# Altium PCB main.PcbDoc
Units mm, origin at the board's own origin, x right, y up, seen from the top; angles counter-clockwise.
Board outline 159.52 x 153.88 mm, 2 copper layers (Top Layer, Bottom Layer); 58 components, 57 nets, 216 pads, 198 vias.
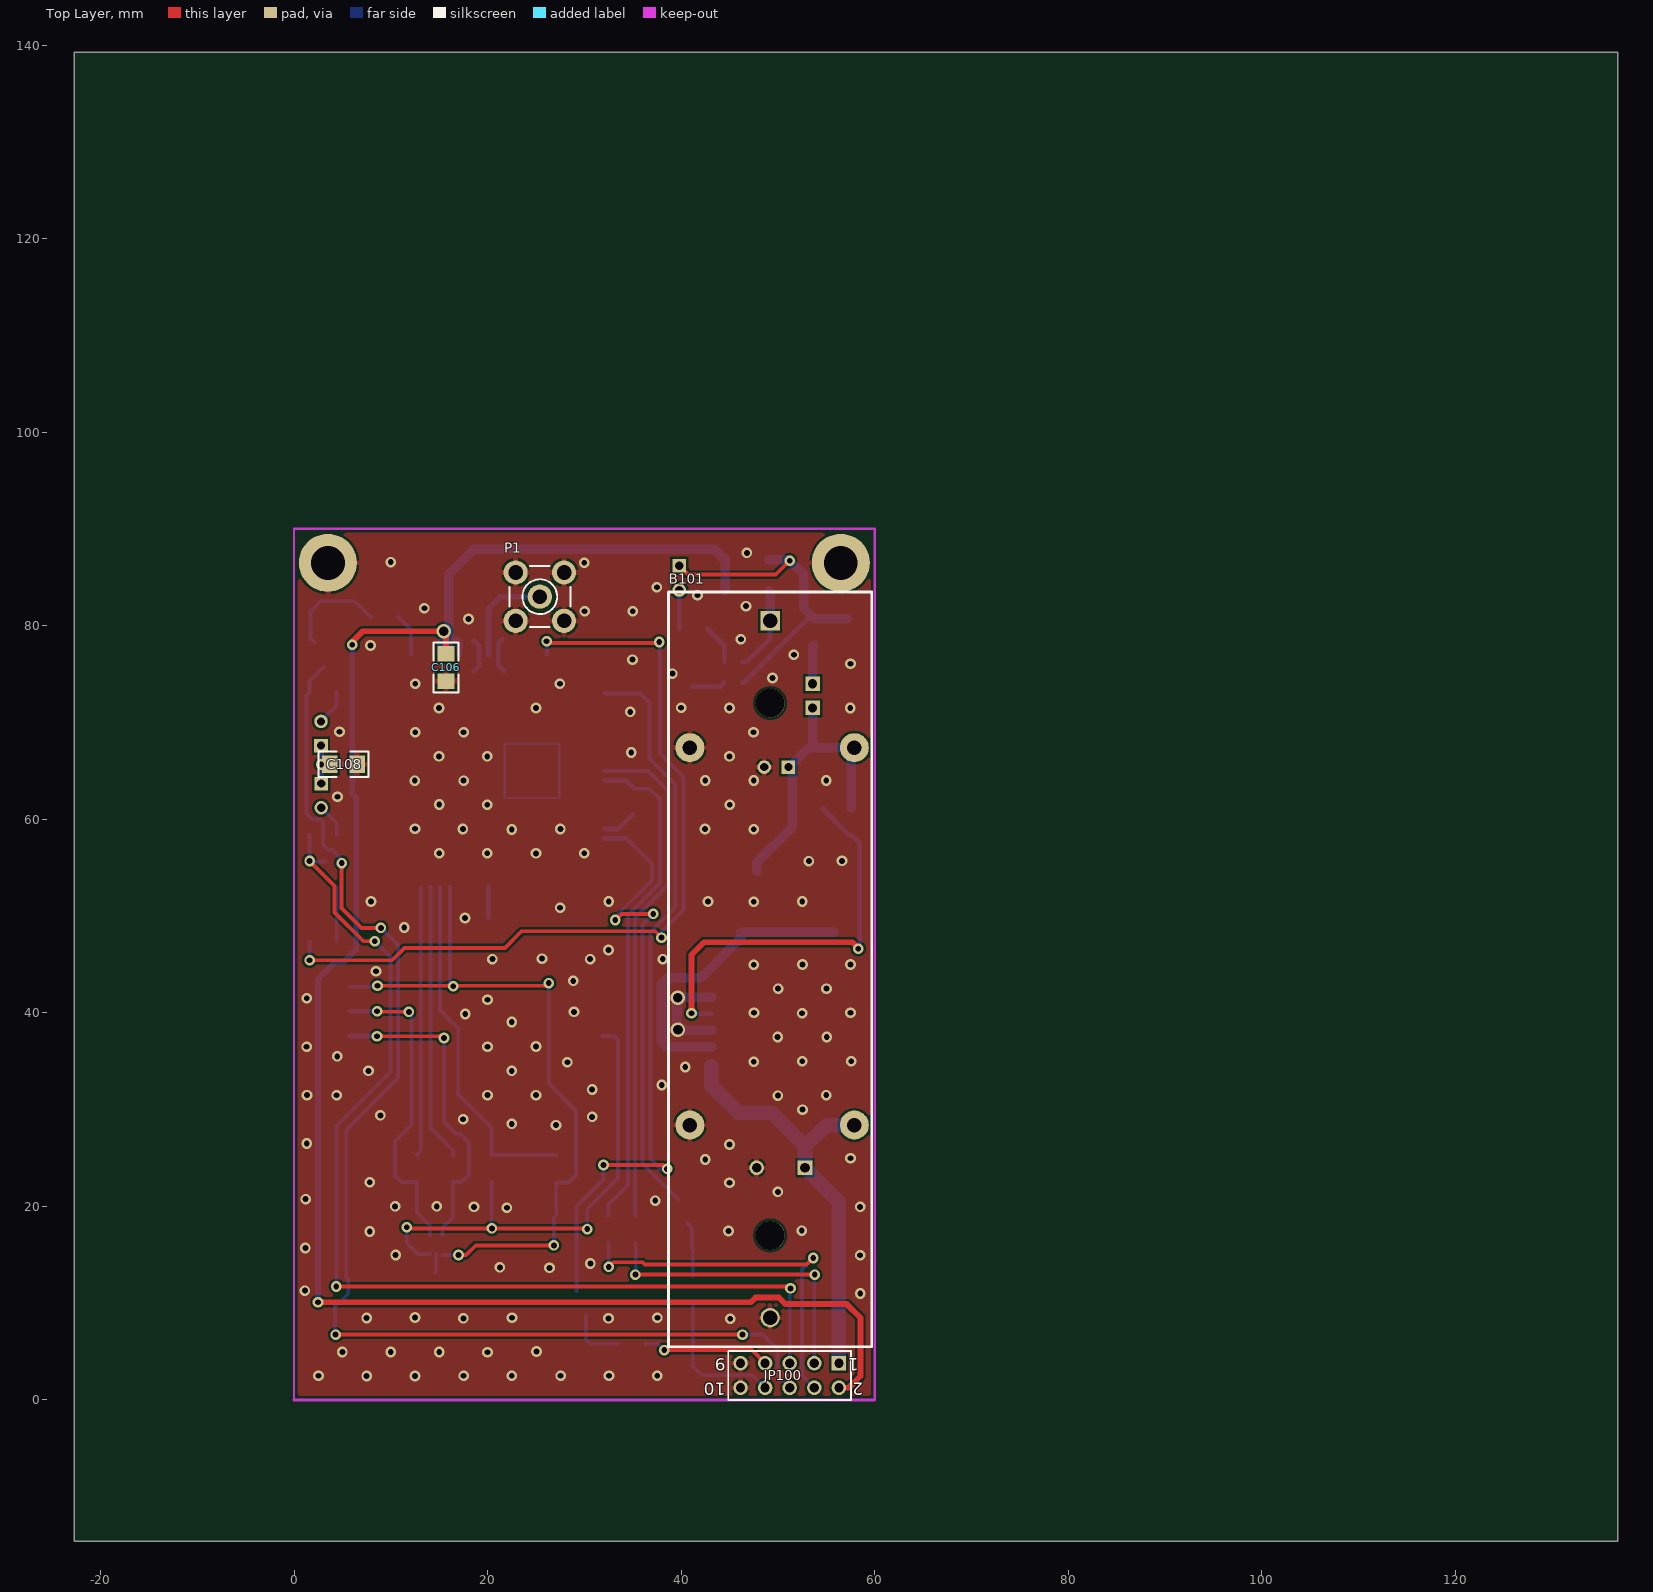
[diagram p0: Top Layer view]
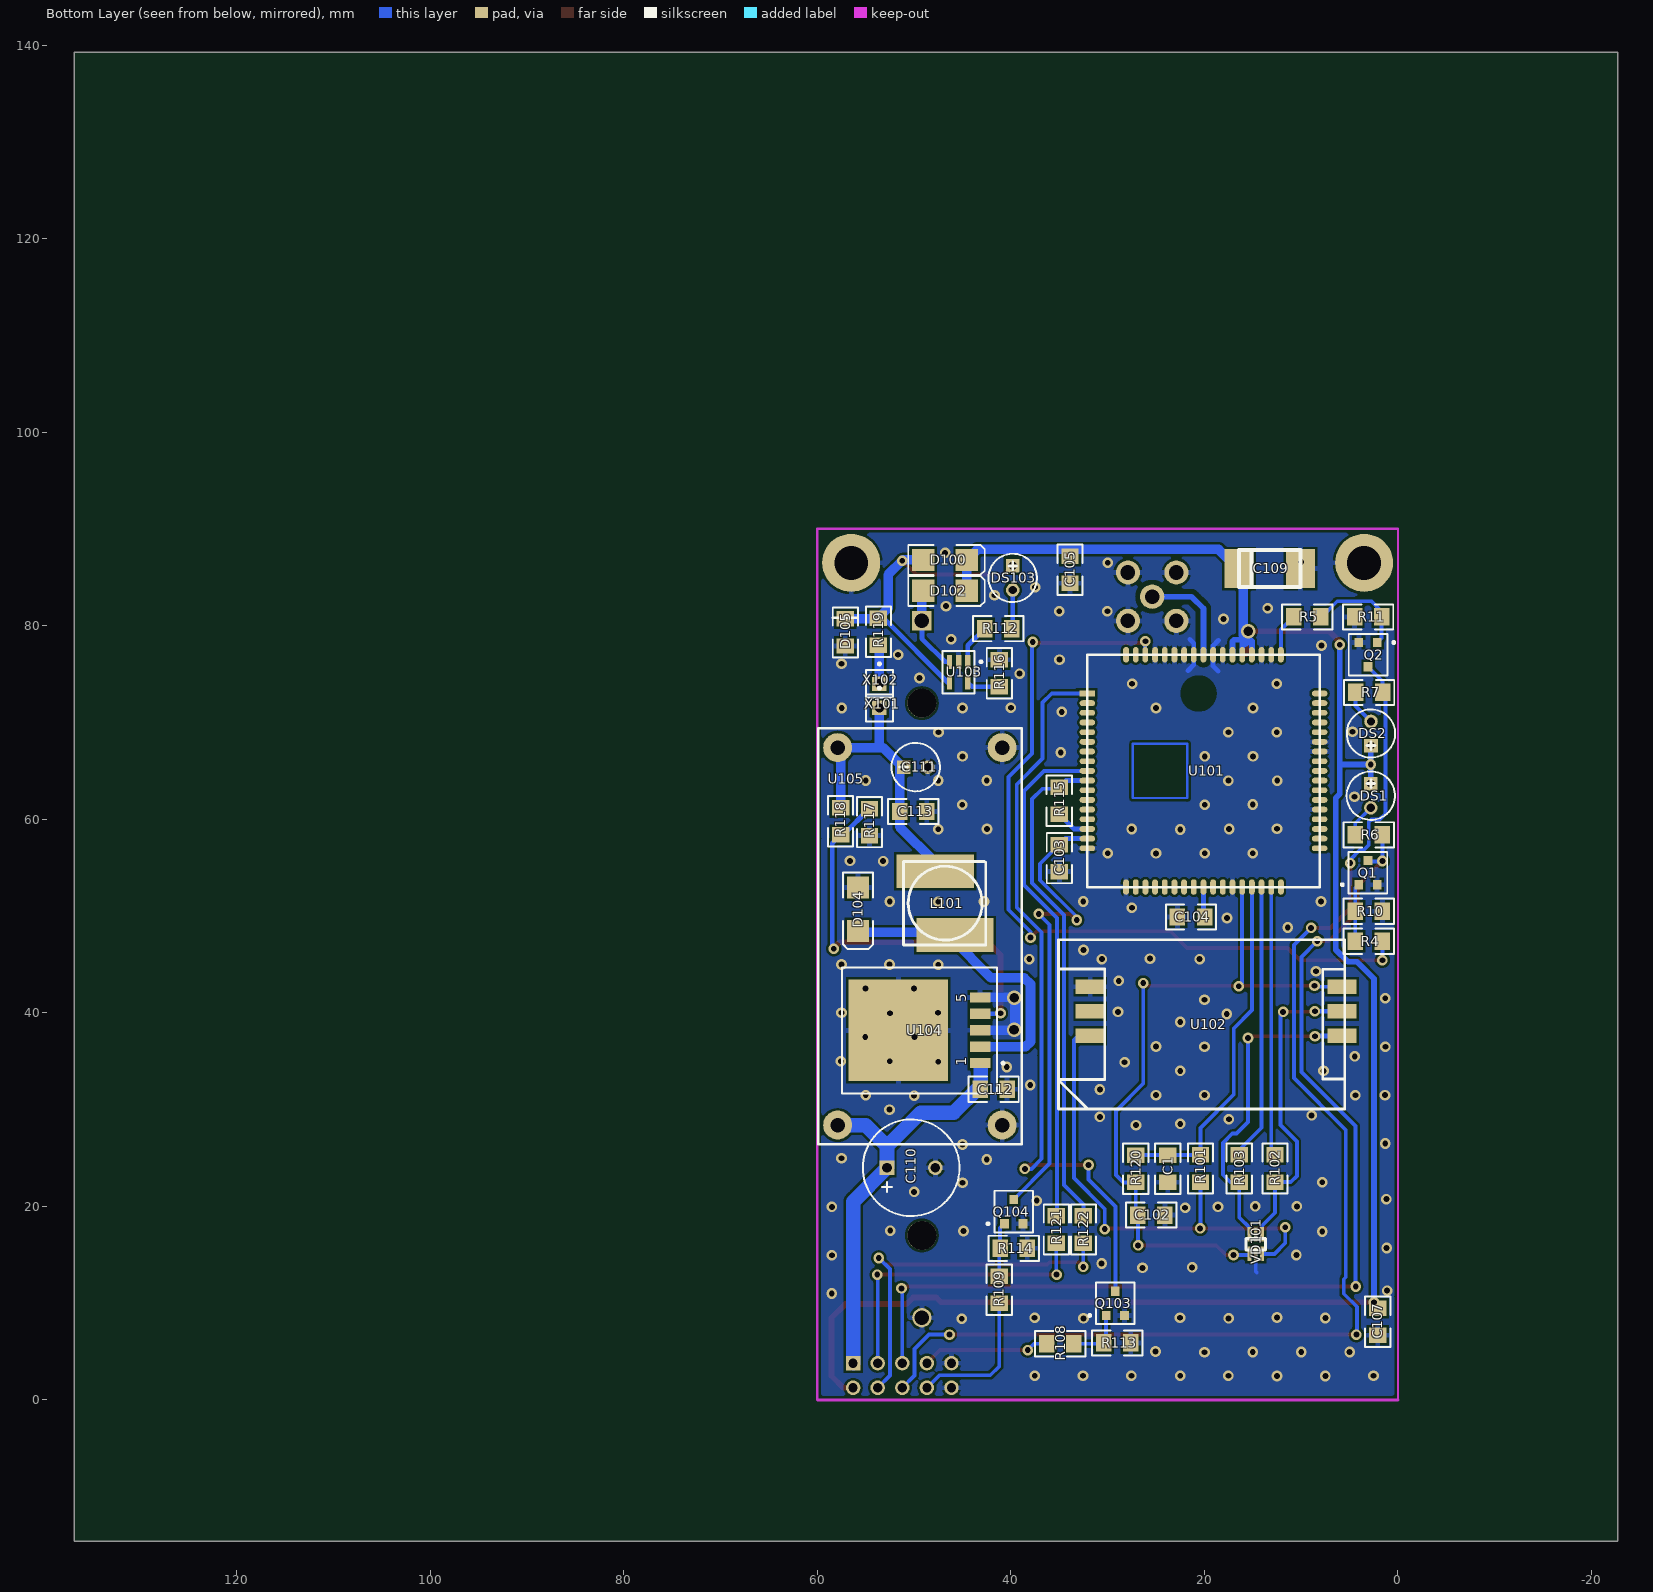
[diagram p1: Bottom Layer view, seen from below]

## Layer stack, top to bottom
Top Layer: signal copper 0.0356
Dielectric: dielectric 0.32, FR-4, Dk 4.8
Bottom Layer: signal copper 0.0356

## Board outline
-22.725,137.75 -22.725,-14.6 136.8,-14.6 136.8,139.275 -22.725,139.275

## Design rules (kind name [scope] priority, off if disabled: settings)
Clearance Clearance_3 [InPoly vs InNet('NetD3_1') or
InNet('NetC10_1') or
InNet('NetD4_2')] p1: gap=0.5
Clearance [InNet('NetP1_1') vs InPoly] p2: gap=0.5
Clearance Clearance_1 [All] p3: gap=0.25
ComponentClearance [All] p1: gap=0.254 collisioncheckmode=0
HoleSize [All] p1: absolutevalues=TRUE maxlimit=4 minlimit=0.025 maxpercent=80.000 minpercent=20.000
PolygonConnect PolygonConnect_1 [HasPad('U4-6')] p1: connectstyle=Direct reliefconductorwidth=0.254 reliefentries=4 polygonreliefangle="90 Angle"
PolygonConnect [All] p2: connectstyle=Relief reliefconductorwidth=0.5 reliefentries=4 polygonreliefangle="90 Angle"
RoutingLayers [All] p1: top layer=Horizontal bottom layer=Vertical
RoutingVias [All] p1: holewidth=0.6 width=1.1 viastyle="Through Hole" minholewidth=0.5 minwidth=1 maxholewidth=1 maxwidth=1.5
SolderMaskExpansion [All] p1: expansion=0.102
TestPointUsage [All] p1: valid=0 allowmultiple=FALSE
Testpoint [All] p1: side=15 testpointundercomponent=TRUE minsize=1.016 maxsize=2.54 preferedsize=1.524 minholesize=0 maxholesize=1.016 preferedholesize=0.813 testpointgrid=0.025 style=1023 order=-539222988
Width [All] p1: maxlimit=3 minlimit=0.2 preferedwidth=0.254 toplayer_prefwidth=0.4 bottomlayer_prefwidth=0.4 minimp=50.000000 maximp=50.000000 favimp=50.000000
15 further rules are at their usual default settings.

## Components (designator, comment, footprint, x,y, rotation, side; value= is the part's Value field where it differs from the comment)
B101 "BAT18650_HOLDER" BAT18650_HOLDER 49.2,44.5 r270 top (schematic designator B1)
C1 "22" _1206 23.8,23.9 r90 bottom
C102 "0.1" _1206 25.5,19.1 r0 bottom (schematic designator C2)
C103 "0.1" _1206 35,56 r90 bottom (schematic designator C3)
C104 "10,0" _1206 21.4,49.9 r0 bottom (schematic designator C4)
C105 "1.0" _1206 33.9,85.8 r90 bottom (schematic designator C5)
C106 "1.0" _1206 15.7,75.7 r90 top (schematic designator C6)
C107 "1.0" _1206 2.1,8.1 r90 bottom
C108 "1.0" _1206 5.1,65.675 r180 top (schematic designator C8)
C109 "10.0x25 tantal" CAP_EL_6_3 16.4,85.9 r180 bottom (schematic designator C9)
C110 "" el5 47.8,24 r0 bottom (schematic designator C10)
C111 "" el3 51.1,65.4 r180 bottom (schematic designator C11)
C112 "Cap" _1206 41.8,32.1 r0 bottom (schematic designator C12)
C113 "Cap" _1206 50.1,60.8 r0 bottom (schematic designator C13)
D100 "10BQ100" DSO-C2/X2.3 46.8,86.8 r180 bottom (schematic designator D1)
D102 "10BQ100" DSO-C2/X2.3 46.8,83.6 r180 bottom (schematic designator D2)
D104 "10BQ100" DSO-C2/X2.3 55.8,50.7 r270 bottom (schematic designator D4)
D105 "D Zener" _1206d 57.1,79.3 r270 bottom (schematic designator D5)
DS1 "LED0" el3 2.8,63.7 r270 bottom
DS2 "LED0" el3 2.8,67.6 r90 bottom
DS103 "LED0" el3 39.8,86.2 r270 bottom (schematic designator DS3)
JP100 "IDC-10" HDR2X5 56.3,3.8 r180 top
L101 "SDR0805-390KL" L10x10 41.7,56.4 r0 bottom (schematic designator L1)
P1 "SMB" SMB_V-RJ45 25.4,83 r0 top
Q1 "BC847" SO-G3/C2.5 3.1,54.5 r180 bottom
Q2 "BC847" SO-G3/C2.5 3.1,77 r0 bottom
Q103 "BC847" SO-G3/C2.5 29.2,10 r180 bottom (schematic designator Q3)
Q104 "BC847" SO-G3/C2.5 39.7,19.475 r180 bottom (schematic designator Q4)
R4 "4K7" _1206 3,47.4 r180 bottom
R5 "4K7" _1206 9.4,80.9 r0 bottom
R6 "300" _1206 3,58.4 r180 bottom
R7 "300" _1206 3,73.1 r0 bottom
R10 "33K" _1206 3,50.5 r180 bottom
R11 "33K" _1206 3.1,80.9 r0 bottom
R101 "22R" _1206 20.4,23.9 r270 bottom (schematic designator R1)
R102 "22R" _1206 12.7,23.9 r270 bottom (schematic designator R2)
R103 "22R" _1206 16.4,23.9 r270 bottom (schematic designator R3)
R108 "4K7" _1206 34.9,5.8 r0 bottom (schematic designator R8)
R109 "4K7" _1206 41.2,11.375 r270 bottom (schematic designator R9)
R112 "300" _1206 41.3,79.7 r180 bottom (schematic designator R12)
R113 "33K" _1206 29,5.9 r180 bottom (schematic designator R13)
R114 "33K" _1206 39.7,15.675 r180 bottom (schematic designator R14)
R115 "10K" _1206 35,61.9 r270 bottom (schematic designator R15)
R116 "2K0" _1206 41.2,75.1 r90 bottom (schematic designator R16)
R117 "*" _1206 54.6,59.7 r270 bottom (schematic designator R17)
R118 "*" _1206 57.6,59.8 r90 bottom (schematic designator R18)
R119 "1R" _1206 53.7,79.4 r90 bottom (schematic designator R19)
R120 "4K7" _1206 27.1,23.9 r90 bottom (schematic designator R20)
R121 "1K0" _1206 35.3,17.6 r270 bottom (schematic designator R21)
R122 "1K0" _1206 32.5,17.6 r270 bottom (schematic designator R22)
U101 "SIM900" SIM900F 20.1,65 r180 bottom (schematic designator U1)
U102 "SIM_HOLDER" SIM_HOLDER_1 20.3,38.8 r270 bottom (schematic designator U2)
U103 "LTC4054" SO-G5/P.95 45.4,75.2 r0 bottom (schematic designator U3)
U104 "LM2596S-ADJ" SIP-G5/Y2.1 47.4,38.2 r90 bottom (schematic designator U4)
U105 "LM2596_MODULE" LM2596_MODULE_1 49.4,47.9 r90 bottom (schematic designator U5)
VD101 "*" sot363 14.7,16.1 r180 bottom (schematic designator VD1)
X101 "Socket" PIN1 53.6,71.5 r180 bottom (schematic designator X1)
X102 "Socket" PIN1 53.6,74 r180 bottom (schematic designator X2)

## Footprints (in the part's own frame and the unit in brackets; to place one, negate y for a bottom-side part, rotate by r counter-clockwise, add the part's x,y. Pads: shape width x height; smd on the part's side, far side on the other; paste and mask are expansions set on the pad)
_1206 [mm]
  rect 1.6x1.8 smd: 1(-1.412,-0.007) 2(1.388,-0.007)
  silkscreen extent -2.61,-1.31 2.59,1.29
_1206d [mm]
  rect 1.6x1.8 smd: 1(1.395,-0.009) 2(-1.405,-0.009)
  silkscreen extent -2.6,-1.31 2.6,1.29
BAT18650_HOLDER [mm]
  round 3 hole 3: 0(-27.5,0) 0(27.5,0)
  rect 2x2 hole 1.5: 1(-36,0)
  round 2 hole 1.5: 2(36,0)
  silkscreen extent -39,-10.5 39,10.5
CAP_EL_6_3 [mm]
  rect 3x4 smd: 1(-0.011,0.006) 2(6.339,0.006)
  silkscreen extent -0.01,-1.9 6.34,1.91
DSO-C2/X2.3 [mm]
  rect 2.3x2.3 smd: 1(-2.252,0.001) 2(2.248,0.001)
  silkscreen extent -3.8,-1.55 4.1,1.55
el3 [mm]
  rect 1.4x1.4 hole 0.85: 1(0.011,-0.008)
  round 1.4 hole 0.85: 2(2.511,-0.008)
  silkscreen extent -1.24,-2.51 3.76,2.49
el5 [mm]
  rect 1.5x1.5 hole 1: 1(5.001,0.007)
  round 1.5 hole 1: 2(0.001,0.007)
  silkscreen extent -2.5,-4.99 7.5,5.01
HDR2X5 [mm]
  rect 1.5x1.5 hole 0.95: 1(0,0)
  round 1.5 hole 0.95: 2(0,2.54) 3(2.54,0) 4(2.54,2.54) 5(5.08,0) 6(5.08,2.54) 7(7.62,0) 8(7.62,2.54) 9(10.16,0) 10(10.16,2.54)
  silkscreen extent -1.27,-1.27 11.43,3.81
L10x10 [mm]
  rect 8x3.5 smd: 1(4.075,8.372) 2(6.107,1.768)
  silkscreen extent 0.9,0.75 9.41,9.39
LM2596_MODULE_1 [mm]
  round 3 hole 1.5: 1(-19.5,8.5) 2(-19.5,-8.5) 3(19.5,-8.5) 4(19.5,8.5)
  silkscreen extent -21.5,-10.5 21.5,10.5
PIN1 [mm]
  rect 1.5x1.5 hole 0.95: 1(0.012,0.005)
  silkscreen extent -1.39,-1.4 1.41,2.18
SIM900F [mm]
  rect 1.6x0.6 smd: 1(-12,8)
  oval 1.6x0.6 smd: 2(-12,7) 3(-12,6) 4(-12,5) 5(-12,4) 6(-12,3) 7(-12,2) 8(-12,1) 9(-12,0) 10(-12,-1) 11(-12,-2) 12(-12,-3) 13(-12,-4) 14(-12,-5) 15(-12,-6) 16(-12,-7) 17(-12,-8) 35(12,-8) 36(12,-7) 37(12,-6) 38(12,-5) 39(12,-4) 40(12,-3) 41(12,-2) 42(12,-1) 43(12,0) 44(12,1) 45(12,2) 46(12,3) 47(12,4) 48(12,5) 49(12,6) 50(12,7) 51(12,8)
  oval 0.6x1.6 smd: 18(-8,-12) 19(-7,-12) 20(-6,-12) 21(-5,-12) 22(-4,-12) 23(-3,-12) 24(-2,-12) 25(-1,-12) 26(0,-12) 27(1,-12) 28(2,-12) 29(3,-12) 30(4,-12) 31(5,-12) 32(6,-12) 33(7,-12) 34(8,-12) 52(8,12) 53(7,12) 54(6,12) 55(5,12) 56(4,12) 57(3,12) 58(2,12) 59(1,12) 60(0,12) 61(-1,12) 62(-2,12) 63(-3,12) 64(-4,12) 65(-5,12) 66(-6.025,12) 67(-7,12) 68(-8,12)
  Top Layer lines w0.254: -1.675,-2.8 -1.675,2.8 ; -1.7,-2.8 -7.3,-2.8 -7.3,2.8 -1.7,2.8
  silkscreen extent -12,-12 12,12
SIM_HOLDER_1 [mm]
  rect 1.5x3 smd: 2(1.18,14.5) 3(-1.36,14.5) 4(-3.9,14.5) 5(-3.9,-11.5) 6(-1.36,-11.5) 7(1.18,-11.5)
  silkscreen extent -8.75,-14.8 8.75,14.8
SIP-G5/Y2.1 [mm]
  rect 1.05x2.1 smd: 1(-3.4,-4.225) 2(-1.7,-4.225) 3(0,-4.225) 4(1.7,-4.225) 5(3.4,-4.225)
  rect 10.5x10.3 smd: 6(-0.01,4.225)
  silkscreen extent -6.52,-6.72 6.48,10.05
SMB_V-RJ45 [mm]
  round 2.5 hole 1.5: 1(0,0) 2(-2.5,-2.5) 2(-2.5,2.5) 2(2.5,-2.5) 2(2.5,2.5)
  silkscreen extent -3.15,-3.15 3.15,3.15
SO-G3/C2.5 [mm]
  rect 0.9x0.95 smd: 1(-0.958,-1.261) 2(0.942,-1.261) 3(-0.008,1.239)
  silkscreen extent -2.78,-2.16 1.99,2.14
SO-G5/P.95 [mm]
  rect 0.55x1.45 smd: 1(-0.95,-1.075) 2(0,-1.075) 3(0.95,-1.075) 4(0.95,1.075) 5(-0.95,1.075)
  silkscreen extent -2.42,-2.2 1.65,2.2
sot363 [mm]
  rect 0.4x1.5 smd: 1(-0.65,-1) 2(0,-1) 3(0.65,-1) 4(0.65,1) 5(0,1) 6(-0.65,1)
  silkscreen extent -1,-0.6 1,0.6

## Part data
C1 C102 C103 C104 C105 C106 C107 C108: library part "Cap Semi", "Capacitor"
C109: library part "Cap Pol1", "Polarized Capacitor (Radial)"
C110 C111: library part "Cap Pol", "Polarized Capacitor (Radial)"
C112 C113: "Capacitor"
D100 D102 D104: library part 10BQ015, "Schottky Rectifier"
D105: "Zener Diode"
DS1 DS2 DS103: "Typical INFRARED GaAs LED"
JP100: library part "Header 10", "Header, 10-Pin"
L101: library part "Inductor Konstr 2", "Magnetic-Core Inductor"
P1: "SMB Straight Connector"
Q1 Q2 Q103 Q104: library part BC847ALT1, "General Purpose Transistor NPN Silicon"
R4 R5 R6 R7 R10 R11 R101 R102 R103 R108 R109 R112 R113 R114 R115 R116 R117 R118 R119 R120 R121 R122: library part Res2, "Resistor"
U104: "Simple Switcher Power Converter 150 kHz 3A Step Down Voltage Regulator"
VD101: library part SMF05C

## Free pads (board coordinates)
  round 6 hole 3.5: 4(3.5,86.5) 4(56.5,86.5)

## Via types
v1: diameter 1.1, hole 0.6, Top Layer to Bottom Layer, 195 vias
v2: diameter 1.5, hole 1, Top Layer to Bottom Layer, 3 vias

## Nets (pads, with @x,y where several pads share a name; then routed paths per layer and width w, separated by ;. In a path a pad name is that pad's centre, name@x,y a point inside that pad or via, vN(x,y) a via of type N, cw(c..) or ccw(c..) an arc to the next point about the centre after c; other vN are vias at no path point)
+5V: D100.1 D105.2 DS103.1 R119.2 U103.4 | length 35.1
  Top Layer w0.4: DS103.1 40.722,85.275 49.775,85.275 v1(51.216,86.716)
  Bottom Layer w0.5: U103.4 46.5,74.125 53.08,80.705 R119.2@53.776,80.705
  Bottom Layer w1: D100.1 51.149,86.801 51.225,86.725 52.675,85.275 52.675,81.806 53.776,80.705 D105.2
+12V: C110.1 C112.2 JP100.1 U104.1 U105.1 | length 44.1
  Bottom Layer w1.5: U104.1@43.125,34.475 43.125,32.475 43.341,32.259 45.9,29.7 49.3,29.7 52.801,26.199 ; JP100.1 56.3,20.494 C110.1 52.801,26.199 ; U105.1 55.002,28.4 52.801,26.199
ADC6: 
GND: B101.2 C1.1 C102.1 C103.1 C104.2 C105.1 C106.1 C107.1 C108.1 C109.2 C110.2 C111.2 C112.1 C113.1 D104.1 D105.1 JP100.9 JP100.10 P1.2 pad.4 Q1.2 Q2.2 Q103.2 Q104.2 R10.2 R11.2 R113.2 R114.2 R116.2 R117.2 U101.17 U101.18 U101.29 U101.39 U101.45 U101.46 U101.53 U101.54 U101.58 U101.59 U101.61 U101.62 U101.63 U101.64 U101.65 U102.5 U103.2 U104.3 U104.5 U104.6 U105.2 U105.3 VD101.2 | length 19.9
  Bottom Layer w0.4: 14.6,13.175 14.7,13.275 VD101.2
  Bottom Layer w0.5: 18.55,78.5 19.1,77.95 19.1,75.825 18.575,75.3 ; 21.525,78.6 21.1,78.175 21.1,75.95 21.7,75.35
  Bottom Layer w1: v2@39.575,41.575 39.575,38.25 39.625,38.2 U104.3 ; v2@39.575,41.65 v2(39.65,41.575) ; v2@39.65,41.6 U104.5
  other v1: 7.5,2.475 12.5,2.475 2.525,2.5 17.525,2.5 22.5,2.5 27.55,2.5 32.55,2.5 37.525,2.5 20,4.925 5,4.95 10,4.95 15,4.95 25.05,5 45.075,8.4 17.5,8.425 32.5,8.425 7.5,8.475 22.525,8.5 37.55,8.5 12.5,8.525 58.5,11 58.5,11 1.125,11.3 26.4,13.65 21.275,13.7 30.625,14.1 58.5,14.95 10.5,14.975 1.175,15.7 7.825,17.4 44.9,17.45 44.9,17.45 52.475,17.5 22,19.85 18.6,19.95 58.5,19.95 10.45,20 14.75,20 37.325,20.6 1.2,20.75 50,21.5 45,22.45 7.825,22.5 42.5,24.85 57.5,24.975 45,26.4 1.325,26.5 27.075,28.4 22.5,28.525 17.475,29 30.8,29.25 8.925,29.4 52.55,30 50,31.45 4.4,31.475 1.35,31.5 20,31.5 25,31.5 55,31.5 30.8,32.075 38,32.55 7.7,34 22.5,34 40.425,34.4 28.25,34.9 47.5,34.95 52.525,35 57.575,35 4.475,35.5 1.3,36.5 20,36.5 25,36.525 49.975,37.5 55.05,37.5 22.5,39.05 17.7,39.875 52.5,39.95 47.525,40 57.5,40 28.925,40.1 20,41.35 1.325,41.5 50.025,42.5 55.025,42.5 28.85,43.3 8.475,44.3 47.5,44.975 52.55,45 57.5,45 20.5,45.55 30.6,45.55 38.1,45.55 25.625,45.6 32.5,46.5 11.4,48.825 17.675,49.8 27.5,50.85 47.5,51.475 7.95,51.5 32.525,51.5 42.775,51.5 52.525,51.5 53.2,55.675 56.625,55.7 25,56.475 15,56.5 19.975,56.5 30,56.5 22.5,58.95 47.5,58.975 17.45,59 27.525,59 42.475,59 12.5,59.025 19.975,61.5 45.025,61.5 15,61.525 4.5,62.325 12.475,64 17.525,64 42.5,64 47.5,64 55,64 14.975,66.5 19.975,66.5 45,66.5 34.85,66.9 12.525,69 17.525,69 47.475,69 4.7,69.05 34.75,71.1 14.975,71.5 25,71.5 45,71.5 57.475,71.5 40,71.525 12.525,74 27.475,74 49.45,74.6 39.1,75.05 57.5,76.075 34.975,76.5 51.65,77 7.9,77.95 46.175,78.6 18.025,80.7 30.025,81.5 35,81.5 13.475,81.8 46.7,82.025 41.7,83.15 37.5,83.975 30,86.5 10,86.575 46.8,87.525
  other v2: 39.675,38.25
GPSPPS: 
GPSPPS: 
GPSRX: 
GPSTX: 
GPSVCC: 
NetB101_1: B101.1 D102.1 U103.3 | length 8.8
  Bottom Layer w0.5: U103.3 46.8,76.275 49.2,78.675 B101.1@49.2,80
  Bottom Layer w1: D102.1 49.2,83.453 B101.1@49.2,80
NetC1_2: C1.2 R101.1 R120.2 U101.31 | length 36.6
  Bottom Layer w0.4: U101.31 15.1,40.275 16.975,38.4 16.975,31.55 20.407,28.118 R101.1 20.419,25.325 27.056,25.325 R120.2
NetC16_2: 
NetC102_2: C102.2 R120.1 U101.30 U102.4 VD101.1 | length 73
  Top Layer w0.4: v1(8.625,42.8) 26.05,42.8 v1(26.325,43.075) ; v1@16.975,14.975 17.775,14.975 18.775,15.975 v1(26.85,15.975)
  Bottom Layer w0.4: U102.4 8.525,42.7 v1(8.625,42.8) ; VD101.1@15.375,14.975 v1(17,14.975) ; U101.30 16.1,43.1 v1(16.45,42.75) ; v1(26.325,43.075) 26.325,32.7 29.15,29.875 29.15,23.225 28.375,22.45 27.131,22.45 R120.1 27.093,19.093 26.85,18.85 v1(26.85,15.975)
NetC103_2: C103.2 Q104.3 U101.16 | length 49
  Top Layer w0.4: v1(33.2,49.6) 33.825,50.225 v1(37.125,50.225)
  Bottom Layer w0.4: v1(33.2,49.6) 33.2,49.925 36.975,53.7 36.975,55.406 C103.2@35.006,57.375 ; v1(37.125,50.225) 36,49.1 36,24.422 Q104.3
  Bottom Layer w0.5: U101.16 34.381,58 C103.2@35.006,57.375
NetC104_1: C104.1 U101.26 | length 3.1
  Bottom Layer w0.5: C104.1@20.012,49.893 20.1,49.981 U101.26
NetC111_1: C111.1 C113.2 L101.2 R118.2 U105.4 X101.1 | length 30.2
  Bottom Layer w1: L101.2 47.807,55.532 51.488,59.213 C113.2 51.488,65.688 53.2,67.4 U105.4 57.593,67.093 R118.2 ; X101.1 53.588,67.612 53.8,67.4
NetD103_1: 
NetD104_2: D104.2 L101.1 U104.2 | length 31.7
  Bottom Layer w1: U104.2 38.475,36.5 37.975,37 37.975,42.975 38.625,43.625 42.05,43.625 46.15,47.725 46.15,48.325 D104.2@55.75,48.325
NetDS1_2: DS1.2 R6.1 | length 3.5
  Bottom Layer w0.4: DS1.2 4.412,59.584 R6.1
NetDS2_2: DS2.2 R7.2 | length 3.7
  Bottom Layer w0.4: DS2.2 4.388,71.707 R7.2
NetDS103_2: DS103.2 R112.2 | length 4
  Bottom Layer w0.5: DS103.2 39.808,79.798 R112.2
NetP1_1: P1.1 U101.60 | length 10.6
  Bottom Layer w0.6: U101.60 20.1,81.775 21.325,83 P1.1
NetQ1_1: Q1.1 R4.1 R10.1 | length 6
  Bottom Layer w0.4: Q1.1 4.412,52.885 R4.1
NetQ2_1: Q2.1 R5.1 R11.1 | length 10.8
  Bottom Layer w0.4: Q2.1 1.688,78.715 R11.1 1.688,81.463 2.75,82.525 6.275,82.525 7.893,80.907 R5.1
NetQ103_1: Q103.1 R108.1 R113.1 | length 6
  Bottom Layer w0.4: Q103.1 30.158,6.217 30.568,5.807 R108.1
NetQ103_3: Q103.3 U101.1 | length 77.4
  Top Layer w0.4: v1(31.975,24.275) 38.15,24.275 v1(38.55,23.875)
  Bottom Layer w0.4: Q103.3 29.208,20.008 31.975,22.775 v1(31.975,24.275) ; U101.1 35.775,73 36.725,72.05 36.725,66.275 39.4,63.6 39.4,50.9 36.825,48.325 36.825,24.925 37.875,23.875 v1(38.55,23.875)
NetQ104_1: Q104.1 R109.1 R114.1 | length 5.7
  Bottom Layer w0.4: Q104.1 41.112,17.76 R114.1 41.207,15.574 R109.1
NetQ105_1: 
NetR4_2: R4.2 U101.66 | length 85.2
  Top Layer w0.4: v1(1.612,45.437) 10.137,45.437 11.4,46.7 21.8,46.7 23.525,48.425 37.325,48.425 v1(37.975,47.775) ; v1@26.125,78.175 26.175,78.225 37.65,78.225 v1(37.75,78.325)
  Bottom Layer w0.4: v1(1.612,45.437) R4.2 ; U101.66 v1@26.125,78.175 ; v1(37.75,78.325) 37.825,78.25 37.825,66.8 40.25,64.375 40.25,50.65 37.975,48.375 v1(37.975,47.775)
  other v1: 26.1,78.4
NetR5_2: R5.2 U101.52 | length 4.5
  Bottom Layer w0.4: R5.2 12.1,79.594 U101.52
NetR101_2: R101.2 U102.7 VD101.3 | length 50.7
  Top Layer w0.4: v1(11.65,17.85) 11.775,17.725 v1@30.3,17.725
  Bottom Layer w0.4: v1(11.65,17.85) 11.65,16.225 12.775,15.1 VD101.3 ; R101.2 20.407,17.768 v1(20.45,17.725) ; v1(30.3,17.65) 30.3,19.75 33.475,22.925 33.475,37.2 33.055,37.62 U102.7
NetR102_1: R102.1 U101.33 | length 27.9
  Bottom Layer w0.4: R102.1 13.1,25.706 U101.33
NetR102_2: R102.2 U102.3 VD101.4 | length 32.4
  Top Layer w0.4: v1(8.59,40.16) 8.643,40.107 11.868,40.107 v1(11.875,40.1)
  Bottom Layer w0.4: v1(11.875,40.1) 11.9,40.075 11.9,40 12.15,39.75 12.15,28.4 10.45,26.7 10.45,23.15 11.088,22.512 R102.2 12.707,19.343 14.05,18 VD101.4
  Bottom Layer w0.5: U102.3 v1(8.59,40.16)
NetR103_1: R103.1 U101.32 | length 28.8
  Bottom Layer w0.4: U101.32 14.1,28.125 16.45,25.775 R103.1@16.45,25.175
NetR103_2: R103.2 U102.2 VD101.6 | length 33.1
  Top Layer w0.4: v1(8.575,37.575) 15.325,37.575 v1(15.5,37.4)
  Bottom Layer w0.4: VD101.6 15.35,17.8 16.407,18.857 R103.2 17.337,22.512 18.1,23.275 18.1,26.55 17.125,27.525 16.7,27.525 15.5,28.725 v1(15.5,37.4)
  Bottom Layer w0.5: U102.2 8.53,37.62 v1(8.575,37.575)
NetR112_1: R112.1 U103.1 | length 4.1
  Bottom Layer w0.5: R112.1 44.45,77.956 U103.1
NetR116_1: R116.1 U103.5 | length 3.4
  Bottom Layer w0.5: R116.1 44.013,73.688 U103.5
NetR117_1: R117.1 R118.1 U104.4 | length 42.8
  Top Layer w0.6: v1(41.075,39.95) 41.075,46 42.375,47.3 57.7,47.3 v1(58.3,46.625)
  Bottom Layer w0.5: v1(41.075,39.95) 41.025,39.9 U104.4 ; R117.1 57.331,58.388 R118.1 58.45,57.531 58.45,46.55 v1(58.3,46.625)
NetR119_1: R119.1 X102.1 | length 4
  Bottom Layer w1: X102.1 53.588,77.883 R119.1
NETSTAT: JP100.6 Q2.3 R7.1 | length 129.2
  Top Layer w0.4: v1(4.3,6.75) v1(46.35,6.75) ; v1(4.925,55.475) 4.925,50.825 6.975,48.775 v1(8.975,48.775)
  Bottom Layer w0.4: Q2.3 1.588,74.257 R7.1 1.3,72.819 1.3,60.575 1.9,59.975 2.75,59.975 3.025,59.7 3.025,57.35 3.525,56.85 3.925,56.85 4.925,55.85 v1(4.925,55.475) ; v1@4.25,6.75 4.25,9.625 5.6,10.975 5.6,12.475 5.4,12.675 5.4,27.9 10.75,33.25 10.75,47 v1(8.975,48.775) ; v1(46.35,6.75) 48.475,6.75 49.95,5.275 49.95,2.53 JP100.6
PB0: 
PB3: 
PB4: 
PB5: 
PC6: 
PD5: 
PD7: 
PWR_SIGN: JP100.7 R108.2 | length 13.2
  Top Layer w0.4: v1(38.25,5.15) 47.33,5.15 JP100.7
  Bottom Layer w0.4: R108.2 37.593,5.807 v1(38.25,5.15)
PWRSTAT: JP100.5 Q1.3 R6.2 | length 109.6
  Top Layer w0.4: v1(1.612,55.687) 4.2,53.1 4.2,50.375 7.175,47.4 v1(8.35,47.4) ; v1(4.375,11.725) 51.1,11.725 v1(51.3,11.525)
  Bottom Layer w0.4: R6.2 v1(1.612,55.687) 1.675,55.625 Q1.3@3.25,55.625 ; v1(4.375,11.725) 4.375,28.3 9.975,33.9 9.975,45.775 v1(8.35,47.4) ; JP100.5 51.22,11.445 v1(51.3,11.525)
RI: U101.4
RST_SIGN: JP100.8 R109.2 | length 14.9
  Bottom Layer w0.4: R109.2 41.207,3.475 42.132,2.55 47.39,2.55 JP100.8
RX: JP100.4 R122.2 | length 38.6
  Top Layer w0.4: v1(32.525,13.75) 33,14.225 36.025,14.225 36.25,14 52.975,14 v1(53.65,14.675)
  Bottom Layer w0.4: R122.2 32.525,16.194 v1(32.525,13.75) ; v1(53.65,14.675) 52.5,13.525 52.5,2.52 JP100.4
RXD: R115.1 R122.1 U101.10 | length 51.8
  Bottom Layer w0.4: R122.1 32.507,20.207 34.5,22.2 34.5,50.125 37.8,53.425 37.8,62.1 36.75,63.15 R115.1@35.169,63.15
  Bottom Layer w0.5: U101.10 34.319,64 R115.1 R115.1@35.169,63.15
TX: JP100.3 R121.2 | length 31
  Top Layer w0.4: v1(35.275,12.95) v1(53.8,12.95)
  Bottom Layer w0.4: v1(35.275,12.95) 35.307,12.982 R121.2 ; JP100.3 53.76,12.91 v1(53.8,12.95)
TXD: R121.1 U101.9 | length 52.8
  Bottom Layer w0.4: U101.9 36.575,65 38.65,62.925 38.65,53.225 36.63,51.205 35.225,49.8 35.225,19.094 R121.1
VBAT: C105.2 C106.2 C107.2 C108.2 C109.1 D100.2 D102.2 DS1.1 DS2.1 JP100.2 U101.55 U101.56 U101.57 | length 203.2
  Top Layer w0.6: v1(2.475,10.1) 47.225,10.1 47.7,10.575 50.1,10.575 50.775,9.9 57.125,9.9 58.525,8.5 58.525,2.475 57.31,1.26 JP100.2 ; v1@2.818,65.682 C108.2 ; v1(6.025,78.025) 6.025,78.35 7.1,79.425 15.075,79.425 15.707,78.793 C106.2
  Bottom Layer w0.6: v1(2.475,10.1) 2.475,43.525 4.225,45.275 5.175,45.275 6.425,46.525 6.425,62.2 6.025,62.6 v1(6.025,78.025) ; DS2.1 2.808,67.595 v1@2.808,65.675 ; DS1.1 v1@2.808,65.66 ; v1@2.818,65.675 6.025,65.675 ; U101.55 15.1,78.4 15.25,78.55 16.925,78.55 17.1,78.375 U101.57 ; U101.56 16.1,78.55
  Bottom Layer w1: v2@15.713,78.762 15.8,78.675 15.8,78.325 ; v2@16,79.05 16,85.35 18.55,87.9 43.453,87.9 D100.2 ; D102.2 D100.2@44.552,86.898
  other v1: 2.818,65.66
  other v2: 15.475,79.425
VDD_EXT: R115.2 U101.15 | length 3.5
  Bottom Layer w0.5: U101.15 33.494,59 R115.2
pads on no net: B101.0 U101.2 U101.3 U101.5 U101.6 U101.7 U101.8 U101.11 U101.12 U101.13 U101.14 U101.19 U101.20 U101.21 U101.22 U101.23 U101.24 U101.25 U101.27 U101.28 U101.34 U101.35 U101.36 U101.37 U101.38 U101.40 U101.41 U101.42 U101.43 U101.44 U101.47 U101.48 U101.49 U101.50 U101.51 U101.67 U101.68 U102.6 VD101.5

## Polygon pours and split planes (outlines as drawn)
GND on Top Layer (hatched 90Degree grid 0.1 track 0.3, remove dead copper): -1.45,91.8 -1.45,-0.9 60.95,-0.9 60.95,91 -1.5,91 -1.5,90.675
GND on Bottom Layer (hatched 90Degree grid 0.1 track 0.3, remove dead copper): -2.45,92.325 -2.45,-2.15 62.85,-2.15 62.85,91.475 -2.55,91.475 -2.55,91.375

## Keep-outs
Keep-Out Layer:
  lines w0.254: 0,0 0,90 60,90 60,0
  lines w0.3: 0,0 60,0

## Silkscreen, mask and mechanical layers (free items; w line width, h text height)
Mechanical 1:
  lines w0.3: 1.5,85.5 8.75,85.5 ; 3.5,80.6 3.5,88 ; 48.5,85.5 59.5,85.5 ; 56.5,78.625 56.5,88

## Dimensions
0,0 to 0,90 on Mechanical 1
0,0 to 60,0 on Mechanical 1

## Text inside footprints (layer, text, board x,y; h text height)
JP100: Top Overlay "2" at 58.84,1.768 h1.27 r180; Top Overlay "1" at 58.332,4.308 h1.27 r180; Top Overlay "9" at 44.616,4.308 h1.27 r180; Top Overlay "10" at 44.616,1.768 h1.27 r180
U104: Bottom Overlay "1" at 44.6,34.55 h1 r270; Bottom Overlay "5" at 44.6,41.1 h1 r270